# Altium PCB Sound_PCB.PcbDoc
Units mm, origin at the board's own origin, x right, y up, seen from the top; angles counter-clockwise.
Board outline 18.5 x 30 mm, 2 copper layers (Top Layer, Bottom Layer), stack 1.571 mm thick; 13 components, 9 nets, 38 pads, 3 vias.
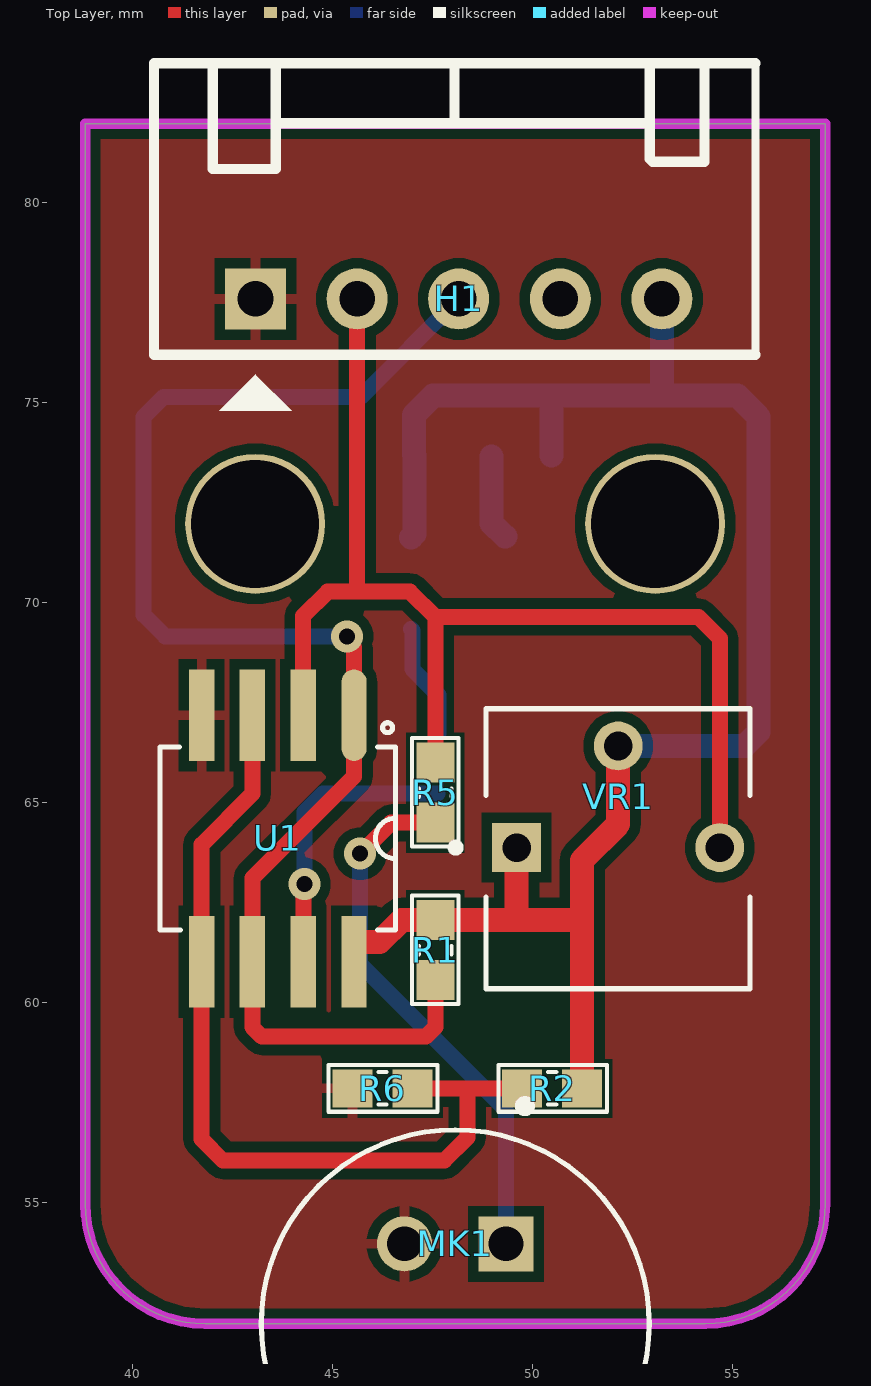
[diagram p0: Top Layer view]
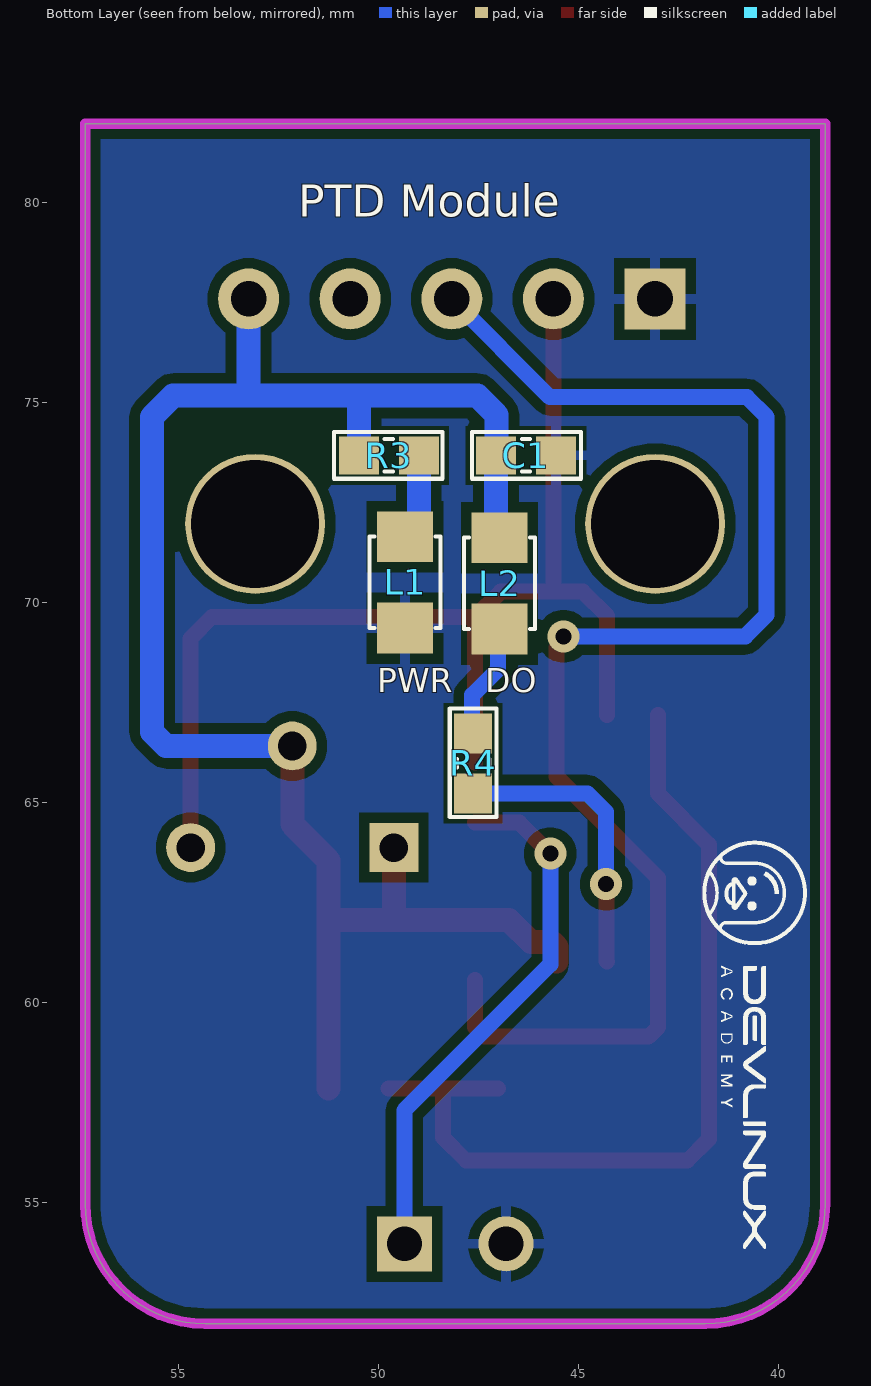
[diagram p1: Bottom Layer view, seen from below]
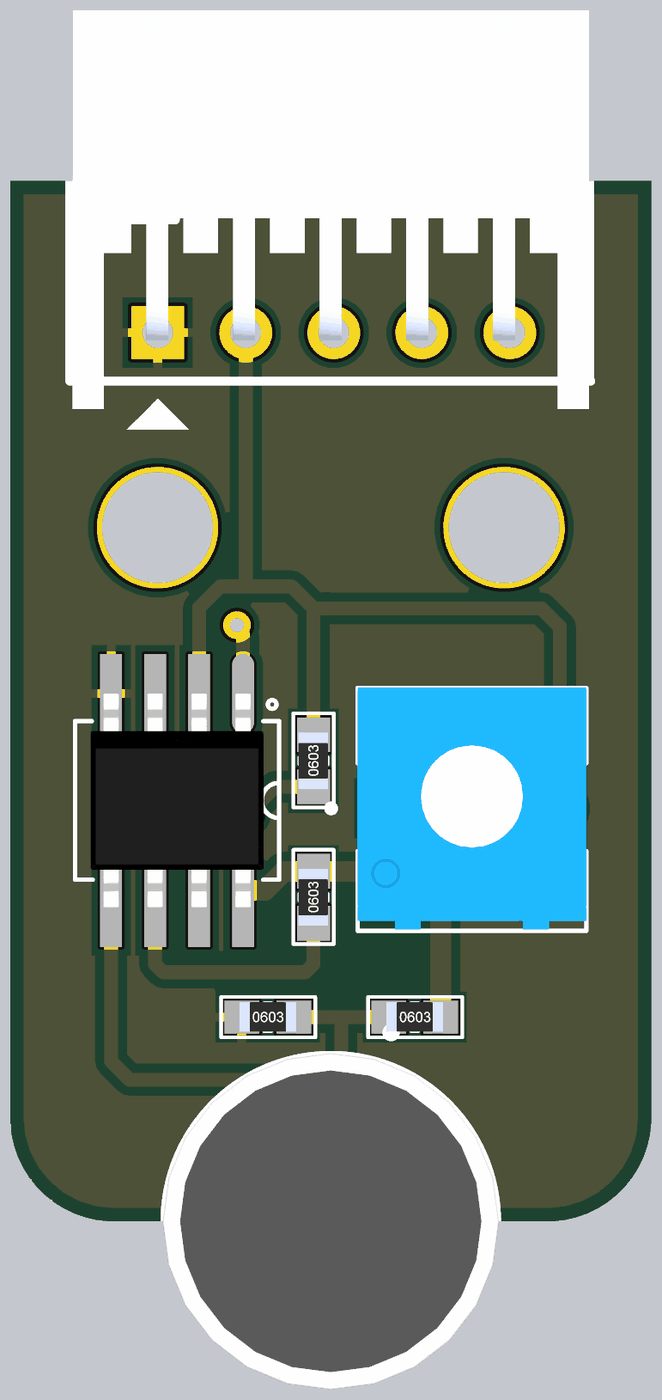
[diagram p2: 3D render of the assembled board from above, using the file's embedded part models]
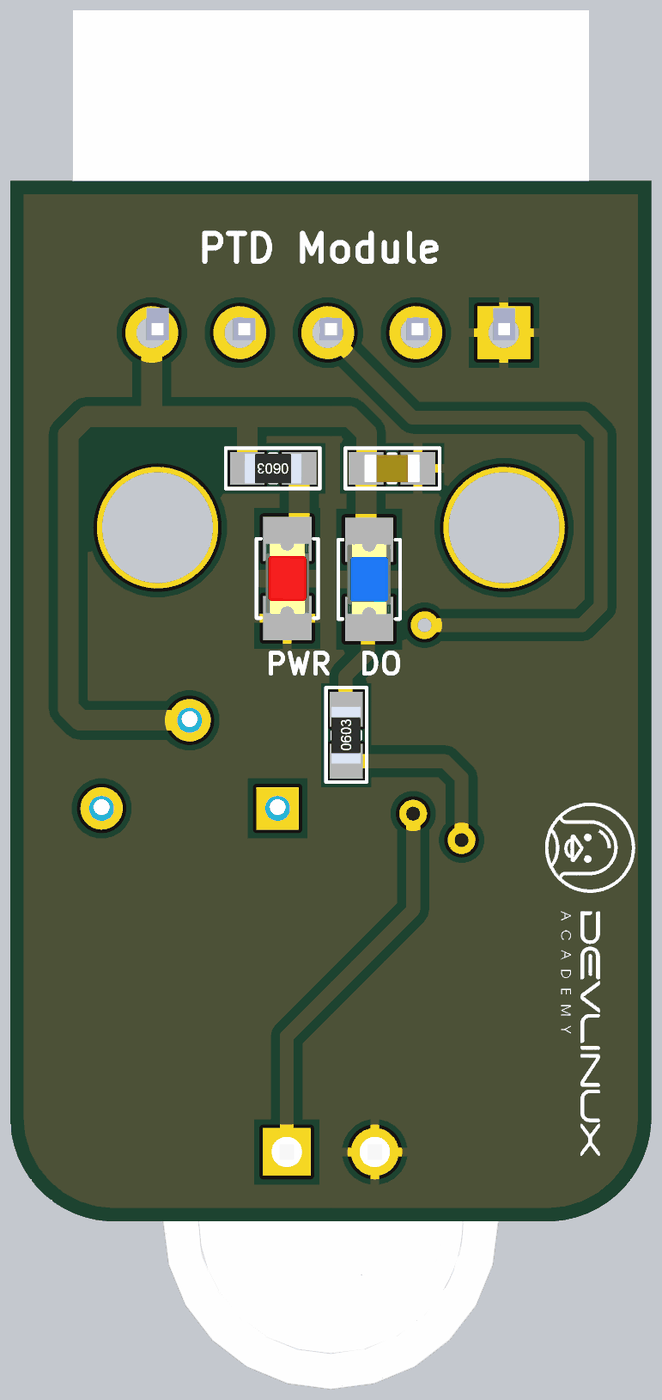
[diagram p3: 3D render of the assembled board from below, using the file's embedded part models]

## Layer stack, top to bottom
Top Solder: solder mask 0.0102, Solder Resist, Dk 3.5
Top Layer: signal copper 0.0356
Dielectric 1: dielectric 1.5, FR-4, Dk 4.8
Bottom Layer: signal copper 0.0356
Bottom Solder: solder mask 0.0102, Solder Resist, Dk 3.5

## Board outline
41.822,51.975 cw(c41.822,54.975) 38.822,54.975 38.822,81.975 57.322,81.975 57.322,54.975 cw(c54.322,54.975) 54.322,51.975

## Design rules (kind name [scope] priority, off if disabled: settings)
Clearance [All] p1: gap=0.254 ignorepadtopadclearanceinfootprint=FALSE except(0: Arc-Hole Track-Hole SMDPad-Hole THPad-Hole Via-Hole Fill-Hole Poly-Hole Region-Hole Text-Hole)
PolygonConnect [All] p1: connectstyle=Relief reliefconductorwidth=0.254 reliefentries=4 polygonreliefangle="90 Angle" airgapwidth=0.254
RoomDefinition Sound_SCH [InComponentClass('Sound_SCH')] p1: confinementstyle=ConfineIn formatcopy=TRUE lockcomponents=FALSE outline 58.471,43.409 79.527,43.409 79.527,53.772 58.471,53.772
RoutingVias [All] p1: holewidth=0.4 width=0.8 viastyle="Through Hole" minholewidth=0.3 minwidth=0.6 maxholewidth=0.5 maxwidth=1
SolderMaskExpansion [All] p1: expansion=0.102 istentingtop=FALSE
Width [All] p1: maxlimit=0.6 minlimit=0.254 preferedwidth=0.4
30 further rules are at their usual default settings.

## Components (designator, comment, footprint, x,y, rotation, side; value= is the part's Value field where it differs from the comment)
C1 "100nF" "tu 0603" 46.304,73.685 r180 bottom
H1 "Header 5P 2.54 Duc Cong" "Header 5P DC 2.54" 43.078,77.597 r90 top
L1 "LED RED" LED-0805-Red 49.327,71.653 r270 bottom
L2 "LED 0805" LED-0805-Blue 46.965,69.342 r90 bottom
MK1 "CMA-4544PF-W" MIC_CMA-4544PF-W 48.072,51.975 r90 top
R1 "10k" "tro smd 0603" 47.574,61.316 r90 top
R2 "100k" "tro smd 0603" 50.495,57.861 r0 top
R3 "1k" "tro smd 0603" 49.733,73.685 r0 bottom
R4 "10k" "tro smd 0603" 47.625,65.989 r90 bottom
R5 "150" "tro smd 0603" 47.574,65.253 r90 top
R6 "100k" "tro smd 0603" 46.253,57.861 r0 top
U1 "LM393DT" SOIC8_50_328_25X90_SMT 43.637,64.11 r270 top
VR1 "Bien tro vuong" TRIM_3362P-1-102 52.146,63.881 r0 top

## Footprints (in the part's own frame and the unit in brackets; to place one, negate y for a bottom-side part, rotate by r counter-clockwise, add the part's x,y. Pads: shape width x height; smd on the part's side, far side on the other; paste and mask are expansions set on the pad)
"Header 5P DC 2.54" [mil]
  rect 60x60 hole 35: 1(0,0)
  round 60 hole 35: 2(0,-100) 3(0,-200) 4(0,-300) 5(0,-400)
  silkscreen extent -110,-492 232,100, body extent -87,-490 366,97, height 240
LED-0805-Blue [mil]
  rect 50x55 smd: 1(0,0) 2(90,0)
  silkscreen extent 0,-35 90,35, body extent 5,-25 85,25, height 43
LED-0805-Red [mil]
  rect 50x55 smd: 1(0,0) 2(90,0)
  silkscreen extent 0,-35 90,35, body extent 5,-25 85,25, height 43
MIC_CMA-4544PF-W [mm]
  rect 1.378x1.378 / inner round 1.378 / far side rect 1.378x1.378 hole 0.87: 1(2,-1.27)
  round 1.378 hole 0.87: 2(2,1.27)
  silkscreen extent -4.85,-4.85 5.54,4.85, body extent -4.85,-4.85 4.85,4.85, height 4.7
SOIC8_50_328_25X90_SMT [mil] "SOIC"
  oval 90x25 smd mask+3: 1(-121.32,75)
  rect 90x25 smd mask+3: 2(-121.32,25) 3(-121.32,-25) 4(-121.32,-75) 5(121.32,-75) 6(121.32,-25) 7(121.32,25) 8(121.32,75)
  silkscreen extent -114,-116 90,116, body extent -121,-98 121,98, height 79
TRIM_3362P-1-102 [mm]
  rect 1.222x1.222 / inner round 1.222 / far side rect 1.222x1.222 hole 0.714: 1(-2.54,0)
  round 1.222 hole 0.714: 2(0,2.54) 3(2.54,0)
  silkscreen extent -4.16,-3.53 3.3,3.47, body extent -3.3,-3.49 3.3,3.49, height 4.88
"tro smd 0603" [mm] "Chip Capacitor, 2-Leads, Body 1,60x0,80mm, IPC Medium Density"
  rect 1x0.95 smd mask+0.076: 1(-0.75,0) 2(0.75,0)
  silkscreen extent -1.35,-0.58 1.37,0.58, body extent -0.82,-0.42 0.82,0.43, height 0.44
"tu 0603" [mm] "Chip Capacitor, 2-Leads, Body 1,60x0,80mm, IPC Medium Density"
  rect 1x0.95 smd mask+0.076: 1(-0.75,0) 2(0.75,0)
  silkscreen extent -1.35,-0.58 1.37,0.58, body extent -0.8,-0.4 0.8,0.4, height 0.9

## Part data
C1: library part "Tu 0603 104 50V 10%", "Dán", Chung_Loai=Dán, Don_Vi=Con, Ma_Hang=MH004568, So_Chan=2, Ten_Linh_Kien="Tụ 0603 104-100nF 10% 50V"
H1: "Cắm", Chung_Loai=Cắm, Don_Vi=Con, Ma_Hang=MH001308, Ten_Linh_Kien="Header 5P XH2.54-5P Đực Cong"
L1: library part "LED 0805 Do", "Dán", Chung_Loai=Dán, Don_Vi=Con, Ma_Hang=MH000897, Ten_Linh_Kien="LED 0805 Màu Đỏ (Red)"
L2: library part "LED 0805 Xanh Duong", "Dán", Chung_Loai=Dán, Don_Vi=Con, Ma_Hang=MH002327, Ten_Linh_Kien="LED 0805 Màu Xanh Dương (Blue)"
MK1: "9.7 mm, Omnidirectional, PCB Mount, 3.0 Vdc, Electret Condenser Microphone", Package=None, Check_prices=https://www.snapeda.com/parts/CMA-4544PF-W/Same+Sky/view-part/?ref=eda, MF="Same Sky", MP=CMA-4544PF-W, SnapEDA_Link=https://www.snapeda.com/parts/CMA-4544PF-W/Same+Sky/view-part/?ref=snap
R1 R2 R4 R6: library part "Tro 0603 5% 100k", "Dán", Chung_Loai=Dán, Don_Vi=Con, Ma_Hang=MH006314, So_Chan=2, Ten_Linh_Kien="Trở 0603 5% 100k"
R3: library part "Tro 0603 1% 1k", "Dán", Chung_Loai=Dán, Don_Vi=Con, Ma_Hang=MH006334, So_Chan=2, Ten_Linh_Kien="Trở 0603 1% 1k"
R5: library part "Tro 0603 5% 150R", "Dán", Chung_Loai=Dán, Don_Vi=Con, Ma_Hang=MH006318, So_Chan=2, Ten_Linh_Kien="Trở 0603 5% 150R"
U1: library part IC_LM393DT, "Comparator General Purpose CMOS, DTL, ECL, MOS, Open-Collector, TTL 8-SO", Alternate Part Number-1=NA, Case/Package=SOIC8, Manufacturer="Texas Instruments", Manufacturer Part Number=LM393DT, Supplier Part Number-1=LM393DT, Supplier-1=ARROW
VR1: "TRIMMER - 1/4in SQ ST CERMET", Package="3362P-1 Bourns Inc.", Check_prices=https://www.snapeda.com/parts/3362P-1-102/Bourns/view-part/?ref=eda, MF=Bourns, MP=3362P-1-102, SnapEDA_Link=https://www.snapeda.com/parts/3362P-1-102/Bourns/view-part/?ref=snap

## Free pads (board coordinates)
  round 3.5 hole 3.2: 2(43.072,71.975) 2(53.072,71.975)

## Via types
v1: diameter 0.8, hole 0.4, Top Layer to Bottom Layer, 3 vias

## Nets (pads, with @x,y where several pads share a name; then routed paths per layer and width w, separated by ;. In a path a pad name is that pad's centre, name@x,y a point inside that pad or via, vN(x,y) a via of type N, cw(c..) or ccw(c..) an arc to the next point about the centre after c; other vN are vias at no path point)
+5: C1.1 H1.5 L2.2 R1.2 R2.2 R3.2 U1.8 VR1.1 VR1.2 | length 44.7
  Top Layer w0.6: U1.8 45.542,61.401 45.66,61.519 46.177,61.519 46.724,62.066 R1.2 49.632,62.066 ; VR1.1 49.606,62.091 49.632,62.066 ; R2.2 51.245,62.078 ; VR1.2 52.146,64.465 51.245,63.564 51.245,62.078 ; 49.632,62.066 51.233,62.066 51.245,62.078
  Bottom Layer w0.6: L2.2 47.054,71.718 C1.1 47.041,73.699 47.041,74.701 47.517,75.177 50.483,75.177 ; R3.2 50.483,75.177 ; VR1.2 55.3,66.421 55.651,66.772 55.651,74.651 55.125,75.177 53.238,75.177 ; H1.5 53.238,75.177 ; 50.483,75.177 53.238,75.177
A_OUT: H1.2 R5.2 U1.2 VR1.3 | length 29.8
  Top Layer w0.4: U1.2 44.272,69.672 44.882,70.282 45.618,70.282 ; H1.2 45.618,70.282 ; R5.2 47.574,69.647 ; VR1.3 54.686,69.113 54.153,69.647 47.574,69.647 ; 45.618,70.282 46.939,70.282 47.574,69.647
D_OUT: H1.3 R1.1 U1.1 U1.6 | length 36.2
  Top Layer w0.4: v1(45.364,69.164) 45.364,69.056 45.542,68.878 45.542,65.659 43.002,63.119 43.002,59.391 43.236,59.157 47.34,59.157 47.574,59.391 R1.1
  Bottom Layer w0.4: v1(45.364,69.164) 40.818,69.164 40.284,69.698 40.284,74.651 40.778,75.144 45.706,75.144 H1.3
GND: C1.2 H1.1 L1.2 MK1.2 R6.1 U1.4
NetL1_1: L1.1 R3.1 | length 2.2
  Bottom Layer w0.6: R3.1@48.983,73.66 48.983,71.988 49.318,71.653 L1.1
NetL2_1: L2.1 R4.2 | length 2.9
  Bottom Layer w0.4: L2.1 47,69.307 47,68.341 47.65,67.691 R4.2@47.65,66.739
NetMK1_1: MK1.1 R5.1 | length 13.5
  Top Layer w0.4: v1(45.695,63.729) 46.469,64.503 R5.1
  Bottom Layer w0.4: v1(45.695,63.729) 45.695,60.96 49.342,57.313 MK1.1
NetR2_1: R2.1 R6.2 U1.3 U1.5 | length 22.2
  Top Layer w0.4: U1.3 43.002,65.227 41.732,63.957 U1.5 41.732,56.591 42.266,56.058 47.803,56.058 48.374,56.629 48.374,57.861 ; R6.2 48.374,57.861 ; R2.1 48.374,57.861
NetR4_1: R4.1 U1.7 | length 7.3
  Top Layer w0.4: U1.7 44.285,61.041 44.285,62.954 v1(44.298,62.967)
  Bottom Layer w0.4: v1(44.298,62.967) 44.298,64.77 44.767,65.239 R4.1
pads on no net: H1.4

## Polygon pours and split planes (outlines as drawn)
GND on Bottom Layer "GND_L02_P000" (solid, remove dead copper, pour order 0): 34.392,85.7 35.382,84.709 60.935,84.709 60.935,38.176 60.427,38.684 33.376,38.684
GND on Top Layer "GND_L01_P001" (solid, remove dead copper, pour order 1): 35.433,85.801 36.119,85.115 60.096,85.115 60.096,38.735 59.995,38.837 35.281,38.837

## Keep-outs
Keep-Out Layer:
  the board outline again, w0.254

## Silkscreen, mask and mechanical layers (free items; w line width, h text height)
Bottom Overlay:
  drawing of 21 lines, arcs and shapes, not listed
  text "PTD Module" at 51.996,79.652 h0.8
  text "DO" at 47.327,67.76 h0.6
  text "PWR" at 50.02,67.76 h0.6